# EAGLE board UHS_20 (EAGLE 5.07)
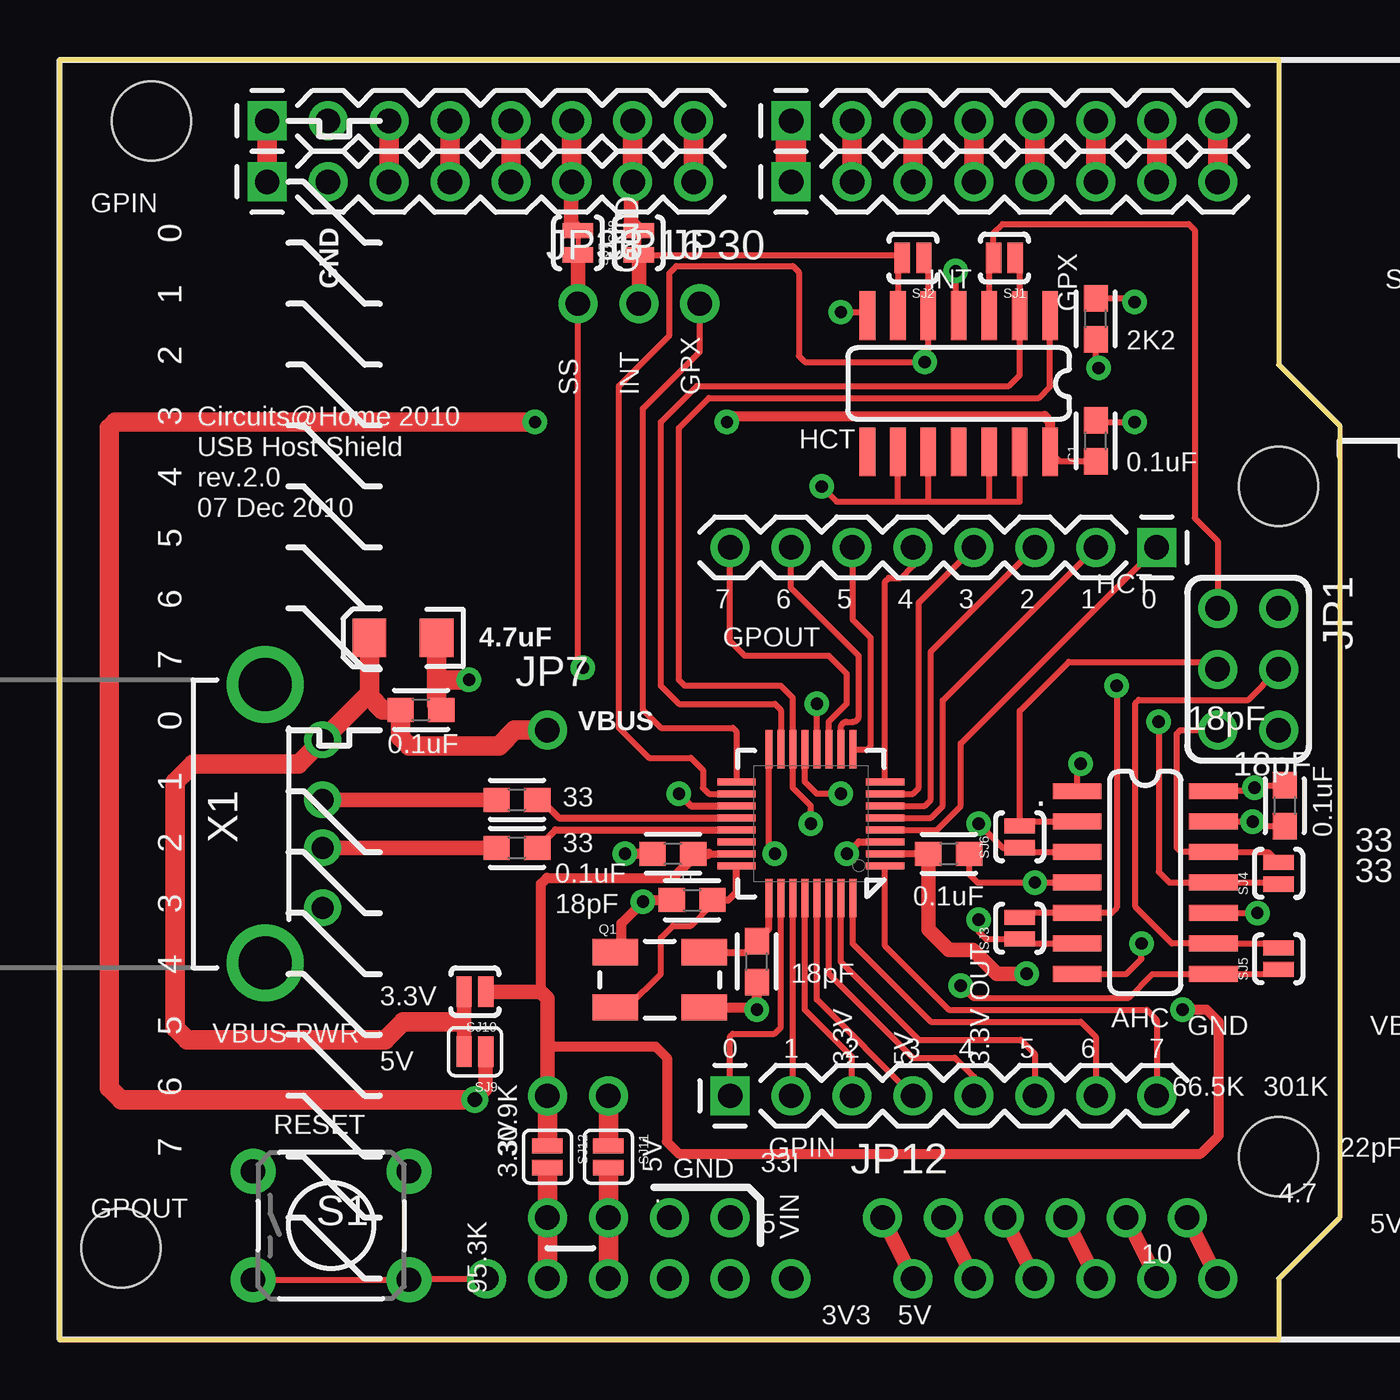
[diagram p0: board, top side]
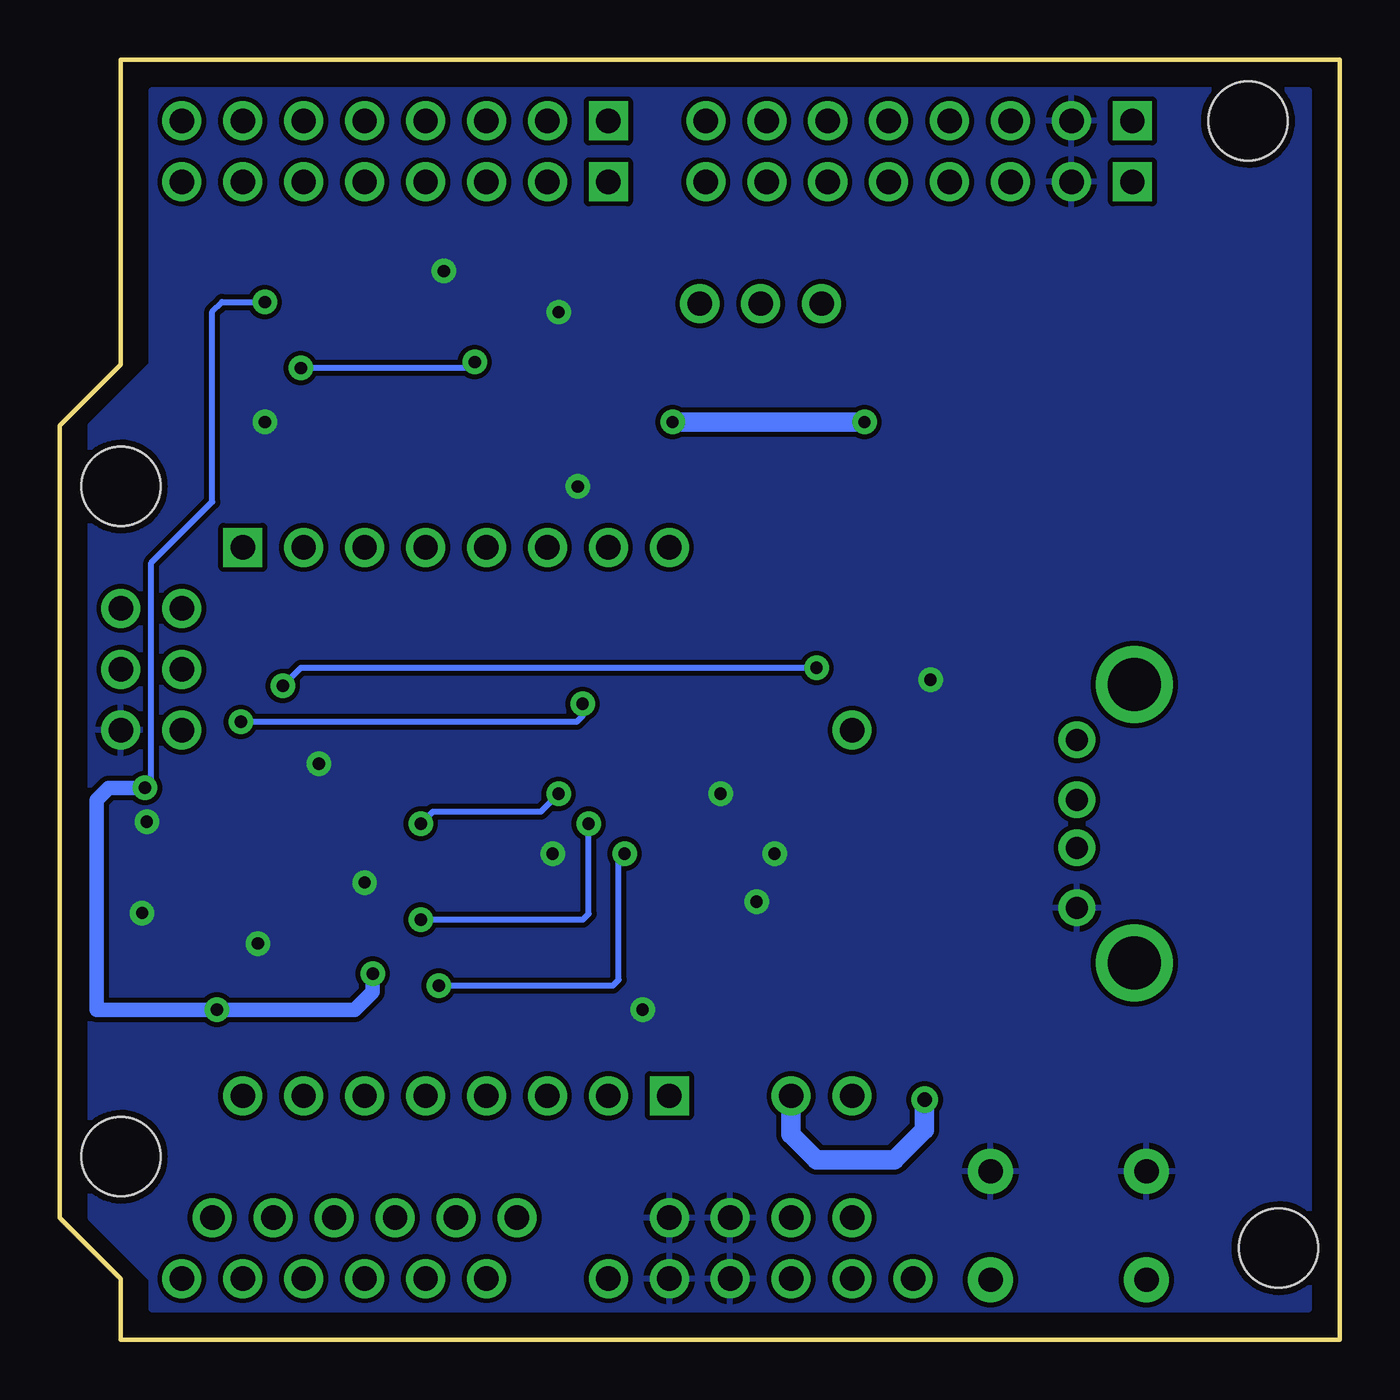
[diagram p1: board, bottom side, seen from below]

Size 53.34 x 53.34 mm. Coordinates in mm from the lower left corner, seen from the top.
Outline: 0,0 0,53.34 50.8,53.34 50.8,40.64 53.34,38.1 53.34,5.08 50.8,2.54 50.8,0 0,0
Copper layers (1*16): Top 0.035mm / dielectric 1.5mm / Bottom 0.035mm
Design rules "CHome": minimum track width 8mil, minimum drill 20mil, track to track 8mil, track to pad 8mil, pad to pad 8mil, via to via 8mil, smd to smd 8mil, copper to edge 10mil, drill to drill 8mil, minimum pad ring 12mil, minimum via ring 10mil, stop-mask expansion 4mil, vias tented up to drill 25mil, thermal gap 10mil
Milling: 8 lines

## Footprints (pad centres in the part's own frame; a part is rotated, then mirrored left to right if it is on the bottom)
0603 = smd 1.1 x 1: 1 -0.85,0; 2 0.85,0
EIA3216 = smd 1.4 x 1.6: A 1.4,0; C -1.4,0
2X03 = drill 1.016 round: 1 -2.54,-1.27; 2 -2.54,1.27; 3 0,-1.27; 4 0,1.27; 5 2.54,-1.27; 6 2.54,1.27
1X08 = drill 1.016 square: 1 0,0 | drill 1.016 round: 2 2.54,0; 3 5.08,0; 4 7.62,0; 5 10.16,0; 6 12.7,0; 7 15.24,0; 8 17.78,0
1X06 = drill 1.016 round: 1 0,0; 2 2.54,0; 3 5.08,0; 4 7.62,0; 5 10.16,0; 6 12.7,0
1X01 = drill 1.016 round: 1 0,0
CRYSTAL-SMD-5X3 = smd 1.9 x 1.1: 1 -1.85,-1.15; 2 1.85,-1.15; 3 1.85,1.15; 4 -1.85,1.15
TACTILE-PTH = drill 1.016 pad 1.88 round: 1 -3.251,2.261; 2 3.251,2.261; 3 -3.251,-2.261; 4 3.251,-2.261
SJ_2S-NO = smd 0.635 x 1.27: 1 -0.45,0; 2 0.45,0
SJ_2S-TRACE = smd 0.635 x 1.27: 1 -0.508,0; 2 0.508,0
SJ_2S = smd 0.635 x 1.27: 1 -0.45,0; 2 0.45,0
TQFP32_8MIL = smd 0.294 x 1.6: 1 -1.75,-3.1; 2 -1.25,-3.1; 3 -0.75,-3.1; 4 -0.25,-3.1; 5 0.25,-3.1; 6 0.75,-3.1; 7 1.25,-3.1; 8 1.75,-3.1; 17 1.75,3.1; 18 1.25,3.1; 19 0.75,3.1; 20 0.25,3.1; 21 -0.25,3.1; 22 -0.75,3.1; 23 -1.25,3.1; 24 -1.75,3.1 | smd 1.6 x 0.294: 9 3.1,-1.75; 10 3.1,-1.25; 11 3.1,-0.75; 12 3.1,-0.25; 13 3.1,0.25; 14 3.1,0.75; 15 3.1,1.25; 16 3.1,1.75; 25 -3.1,1.75; 26 -3.1,1.25; 27 -3.1,0.75; 28 -3.1,0.25; 29 -3.1,-0.25; 30 -3.1,-0.75; 31 -3.1,-1.25; 32 -3.1,-1.75
SO014 = smd 0.66 x 2.032: 1 -3.175,-2.68; 2 -1.905,-2.68; 3 -0.635,-2.68; 4 0.635,-2.68; 5 1.905,-2.68; 6 3.175,-2.68; 7 4.445,-2.68; 8 4.445,2.997; 9 3.175,2.997; 10 1.905,2.997; 11 0.635,2.997; 12 -0.635,2.997; 13 -1.905,2.997; 14 -3.175,2.997
STAND-OFF = hole 3.302: 0,0
USB-A-H = drill 0.914 round: D+ 2.4,-1; D- 2.4,1; GND 2.4,-3.5; VBUS 2.4,3.5 | drill 2.2 round: GND@1 0,5.8; GND@2 0,-5.8

## Placement (x,y rotation side)
C1  0.1uF  [0603]  43.18,37.47 90 top
C3  0.1uF  [0603]  15.05,26.25 0 top
C4  4.7uF  [EIA3216]  14.3,29.25 180 top
C6  0.1uF  [0603]  51.05,22.25 270 top
C7  0.1uF  [0603]  37.05,20.25 0 top
C8  18pF  [0603]  29.05,15.76 90 top
C9  18pF  [0603]  26.35,18.32 0 top
C11  0.1uF  [0603]  25.55,20.25 180 top
JP1  [2X03]  49.53,27.94 270 top
JP2  [1X08]  8.64,50.8 0 top
JP3  [1X08]  8.64,48.26 0 top
JP4  [1X08]  30.48,50.8 0 top
JP5  [1X08]  30.48,48.26 0 top
JP6  [1X06]  17.78,2.54 0 top
JP7  VBUS  [1X01]  20.32,25.4 0 top
JP8  [1X06]  35.56,2.54 0 top
JP9  ARD_5V  [1X01]  22.86,5.08 0 top
JP10  GPIN  [1X08]  27.94,10.16 0 top
JP11  GPOUT  [1X08]  45.72,33.02 180 top
JP12  [1X06]  34.29,5.08 0 top
JP15  ARD_3V3  [1X01]  20.32,5.08 0 top
JP16  INT  [1X01]  24.13,43.18 0 top
JP23  3V3  [1X01]  20.32,10.16 0 top
JP24  5V  [1X01]  22.86,10.16 0 top
JP27  GND  [1X01]  25.4,5.08 0 top
JP28  GND  [1X01]  27.94,5.08 0 top
JP30  GPX  [1X01]  26.67,43.18 0 top
JP38  SS  [1X01]  21.59,43.18 0 top
Q1  12MHz  [CRYSTAL-SMD-5X3]  25,15 0 top
R1  33 1%  [0603]  19.05,20.5 0 top
R2  33 1%  [0603]  19.05,22.5 0 top
R4  2.2K  [0603]  43.18,42.55 90 top
S1  [TACTILE-PTH]  11.3,4.75 0 top
SJ1  SOLDERJUMPERNO  [SJ_2S-NO]  39.37,45.09 180 top
SJ2  SOLDERJUMPERNO  [SJ_2S-NO]  35.56,45.09 180 top
SJ3  SOLDERJUMPERNO  [SJ_2S-NO]  40.01,17.14 90 top
SJ4  SOLDERJUMPERNO  [SJ_2S-NO]  50.8,19.43 90 top
SJ5  SOLDERJUMPERNO  [SJ_2S-NO]  50.8,15.88 90 top
SJ6  SOLDERJUMPERNO  [SJ_2S-NO]  40.01,20.95 90 top
SJ7  SOLDERJUMPERTRACE  [SJ_2S-TRACE]  24.13,45.72 90 top
SJ8  SOLDERJUMPERTRACE  [SJ_2S-TRACE]  21.59,45.72 270 top
SJ9  SOLDERJUMPERNC  [SJ_2S]  17.3,12 180 top
SJ10  SOLDERJUMPERNO  [SJ_2S-NO]  17.3,14.5 180 top
SJ11  SOLDERJUMPERNC  [SJ_2S]  22.86,7.62 270 top
SJ12  SOLDERJUMPERNC  [SJ_2S]  20.32,7.62 270 top
U1  MAX3421E  [TQFP32_8MIL]  31.3,21.5 90 top
U6  74HCT125  [SO014]  38.1,40.01 180 top
U7  74AHC125  [SO014]  45.09,19.68 270 top
U$1  STAND-OFF  [STAND-OFF]  2.54,3.81 0 top
U$3  STAND-OFF  [STAND-OFF]  3.81,50.8 0 top
U$4  STAND-OFF  [STAND-OFF]  50.8,35.56 0 top
U$5  STAND-OFF  [STAND-OFF]  50.8,7.62 0 top
X1  USB-A-H  [USB-A-H]  8.55,21.5 0 top

## Library data of the parts
C1 C3 C4 C6-C9 C11 Q1 R1 R2 R4 = CH_passive
JP1-JP12 JP15 JP16 JP23 JP24 JP27 JP28 JP30 JP38 SJ1-SJ12 X1 = CH_connectors
S1 U$1 U$3-U$5 = SparkFun
U1 = CH_Maxim
U6 U7 = CH_logic

## Nets
3.3V: C6.1 C7.1 C11.1 JP23.1 R4.2 SJ10.1 SJ12.1 U1.2 U1.23 U7.14
5V: C1.1 JP24.1 SJ9.1 SJ11.1 U6.14
ARD_3V3: JP6.2 JP15.1 SJ12.2
ARD_5V: JP6.3 JP9.1 SJ11.2
ARD_MISO: JP1.1 SJ1.2 U6.3
ARD_MOSI: JP1.4 SJ5.2 U7.9
ARD_RST: JP1.5 SJ4.2 U7.12
ARD_SCK: JP1.3 SJ6.2 U7.2
AREF: JP2.1 JP3.1
D0: JP4.8 JP5.8
D1: JP4.7 JP5.7
D2: JP4.6 JP5.6
D3: JP4.5 JP5.5
D4: JP4.4 JP5.4
D5: JP4.3 JP5.3
D6: JP4.2 JP5.2
D7: JP4.1 JP5.1
D8: JP2.8 JP3.8
D9: JP2.7 JP3.7 SJ7.2
D10: JP2.6 JP3.6 SJ8.1
D11: JP2.5 JP3.5
D12: JP2.4 JP3.4
D13: JP2.3 JP3.3
GI0: JP10.1 U1.26
GI1: JP10.2 U1.27
GI2: JP10.3 U1.28
GI3: JP10.4 U1.29
GI4: JP10.5 U1.30
GI5: JP10.6 U1.31
GI6: JP10.7 U1.32
GI7: JP10.8 U1.1
GND: C1.2 C3.2 C4.C C6.2 C7.2 C8.1 C9.1 C11.2 JP1.6 JP2.2 JP3.2 JP6.4 JP6.5 JP27.1 JP28.1 Q1.2 Q1.4 S1.1 S1.2 U1.3 U1.19 U6.4 U6.7 U6.9 U6.10 U6.12 U6.13 U7.1 U7.4 U7.7 U7.10 U7.13 X1.GND
GO0: JP11.1 U1.4
GO1: JP11.2 U1.5
GO2: JP11.3 U1.6
GO3: JP11.4 U1.7
GO4: JP11.5 U1.8
GO5: JP11.6 U1.9
GO6: JP11.7 U1.10
GO7: JP11.8 U1.11
GPX: JP30.1 U1.17
INT: R4.1 SJ2.1 U1.18 U6.5
MISO: SJ1.1 U1.15 U6.2
MOSI: SJ5.1 U1.16 U7.8
MRST: SJ4.1 U1.12 U7.11
N$1: JP8.1 JP12.1
N$2: JP8.2 JP12.2
N$3: JP8.3 JP12.3
N$4: JP8.4 JP12.4
N$5: JP8.5 JP12.5
N$6: JP8.6 JP12.6
N$8: R1.2 U1.21
N$16: R2.2 U1.20
N$40: C8.2 Q1.3 U1.25
N$41: C9.2 Q1.1 U1.24
N$45: R1.1 X1.D+
N$54: R2.1 X1.D-
RESET: JP6.1 S1.3 S1.4
SCLK: SJ6.1 U1.13 U7.3
SS: SJ3.1 U1.14 U6.1 U7.6
U66: JP16.1 SJ2.2 SJ7.1 U6.6
U79: JP38.1 SJ3.2 SJ8.2 U7.5
VBUS: C3.1 C4.A JP7.1 SJ9.2 SJ10.2 X1.VBUS
VIN: JP6.6

## Tracks (layer width: path | path; a pad name or v marks a point on that pad's centre or on a via)
3.3V  (via drill 0.51)
  Top 0.254: U7.14 49.66,22.86 v49.8,23 49.9,23.1 C6.1 | R4.2 44.8,43.4 v44.8,43.25
  Top 0.294: C7.1 U1.2 | 27.05,20.25 U1.23
  Top 0.406: 26.55,20.25 27.05,20.25 | 26.55,20.25 C11.1 | 26.55,20.25 25.55,19.25 20.3,19.25 20.05,19 20.05,14.5 | 20.32,12.22 24.83,12.22 25.3,11.75 25.3,8.25 25.8,7.75 47.55,7.75 48.3,8.5 48.3,13.25 47.8,13.75 v46.8,13.75
  Top 0.61: C7.1 36.2,17.1 37.05,16.25 38.05,16.25 39.05,15.25 v40.3,15.25 | SJ12.1 20.32,8.39 | JP23.1 20.32,12.22 20.32,14.23 20.05,14.5 SJ10.1
  Top 0.813: 20.32,8.39 JP23.1
  Bottom 0.254: v49.8,23 49.53,23 49.53,32.38 46.99,34.92 46.99,42.85 46.59,43.26 v44.8,43.26 v44.8,43.25
  Bottom 0.61: v49.8,23 51.3,23 51.8,22.5 51.8,13.75 v46.8,13.75 41.05,13.75 40.3,14.5 v40.3,15.25
5V  (via drill 0.51, 0.6)
  Top 0.254: C1.1 41.67,36.62 U6.14
  Top 0.406: U6.14 41.27,38.27 41.05,38.5 28.05,38.5 v27.8,38.25
  Top 0.61: 22.86,8.39 SJ11.1 | SJ9.1 17.75,10.45 v17.3,10
  Top 0.813: JP24.1 22.86,8.39 | v17.3,10 2.55,10 2.05,10.5 2.05,38 2.3,38.25 v19.8,38.25
  Bottom 0.813: JP24.1 22.86,8.56 21.8,7.5 18.55,7.5 17.3,8.75 v17.3,10 | v19.8,38.25 v27.8,38.25
ARD_3V3
  Top 0.61: 20.3,7.15 SJ12.2 20.32,6.85
  Top 0.813: JP6.2 JP15.1 20.32,6.85
ARD_5V
  Top 0.61: 22.86,6.85 SJ11.2
  Top 0.813: JP6.3 JP9.1 22.86,6.85
ARD_MISO
  Top 0.254: U6.3 38.73,44.9 SJ1.2 | SJ1.2 38.84,45 | JP1.1 48.26,33.29 47.3,34.25 47.3,46.25 47.05,46.5 39.3,46.5 38.92,46.12 SJ1.2
ARD_MOSI
  Top 0.254: SJ5.2 50.62,16.51 U7.9 46.35,16.51 44.84,18.03 44.84,26.54 44.97,26.67 49.53,26.67 50.74,27.88 50.74,27.94 JP1.4
ARD_RST
  Top 0.254: JP1.5 46.7,25.4 46.55,25.25 46.55,20.5 46.73,20.32 U7.12 50.37,20.32 SJ4.2
ARD_SCK
  Top 0.254: U7.2 40.19,21.59 SJ6.2 40.01,26.2 42.05,28.25 47.95,28.25 JP1.3
AREF
  Top 0.254: 8.55,48.25 8.56,48.26 | 8.56,48.26 JP3.1 | 8.56,48.26 8.64,48.34
  Top 0.813: 8.64,48.34 JP2.1
D0
  Top 0.254: 48.3,48.25 48.29,48.26 | 48.29,48.26 JP5.8 | 48.29,48.26 48.26,48.29
  Top 0.813: 48.26,48.29 JP4.8
D1
  Top 0.254: 45.8,48.25 45.79,48.26 | 45.79,48.26 JP5.7 | 45.79,48.26 45.72,48.33
  Top 0.813: 45.72,48.33 JP4.7
D2
  Top 0.254: 43.3,48.25 43.29,48.26 | 43.29,48.26 JP5.6 | 43.29,48.26 43.18,48.37
  Top 0.813: 43.18,48.37 JP4.6
D3
  Top 0.254: 40.55,48.25 40.56,48.26 | 40.56,48.26 JP5.5 | 40.56,48.26 40.64,48.34
  Top 0.813: 40.64,48.34 JP4.5
D4
  Top 0.254: 38.05,48.25 38.06,48.26 | 38.06,48.26 JP5.4 | 38.06,48.26 38.1,48.3
  Top 0.813: 38.1,48.3 JP4.4
D5
  Top 0.254: JP5.3
  Top 0.813: JP5.3 JP4.3
D6
  Top 0.254: 33.05,48.25 33.04,48.26 | 33.04,48.26 JP5.2 | 33.04,48.26 33.02,48.28
  Top 0.813: 33.02,48.28 JP4.2
D7
  Top 1.27: JP5.1 JP4.1
D8
  Top 0.254: 26.42,48.38 26.54,48.26 JP3.8
  Top 0.813: 26.42,48.38 JP2.8
D9
  Top 0.254: 23.88,48.33 23.81,48.26 JP3.7
  Top 0.61: 23.81,48.26 23.81,46.55 SJ7.2
  Top 0.813: 23.88,48.33 JP2.7
D10
  Top 0.254: 21.31,48.26 JP3.6 | 21.31,48.26 21.34,48.29 | 21.31,48.01 21.31,48.26
  Top 0.61: 21.31,48.01 21.31,46.51 SJ8.1
  Top 0.813: 21.34,48.29 JP2.6
D11
  Top 0.254: JP3.5 18.8,48.25
  Top 0.813: JP3.5 JP2.5
D12
  Top 0.254: 16.3,48.25 16.29,48.26 | 16.29,48.26 JP3.4 | 16.29,48.26 16.26,48.29
  Top 0.813: 16.26,48.29 JP2.4
D13
  Top 0.254: 13.8,48.25 13.79,48.26 | 13.79,48.26 JP3.3 | 13.79,48.26 13.72,48.33
  Top 0.813: 13.72,48.33 JP2.3
GI0
  Top 0.254: U1.26 30.05,13.02 29.78,12.75 28.05,12.75 27.94,12.64 JP10.1
GI1
  Top 0.254: U1.27 30.55,10.23 JP10.2
GI2
  Top 0.254: U1.28 31.05,13.75 33.02,11.78 JP10.3
GI3
  Top 0.254: U1.29 31.55,14.17 JP10.4
GI4
  Top 0.254: U1.30 32.05,15.25 35.55,11.75 37.3,11.75 38.1,10.95 JP10.5
GI5
  Top 0.254: JP10.6 40.64,11.91 40.05,12.5 35.8,12.5 32.55,15.75 U1.31
GI6
  Top 0.254: U1.32 33.05,16.5 36.3,13.25 42.55,13.25 43.18,12.62 JP10.7
GI7
  Top 0.254: U1.1 34.4,16.4 37.05,13.75 45.3,13.75 45.72,13.33 JP10.8
GND  (via drill 0.51)
  Top 0.254: U7.4 v40.64,19.05 38.25,19.05 37.9,19.4 C7.2 | U7.13 v49.72,21.59 49.91,21.4 C6.2 | U7.7 44.45,15.24 45.09,15.88 v45.09,16.51 | U7.10 v49.91,17.78 | U7.1 42.41,23.86 v42.55,24 | U6.13 40.01,34.92 38.73,34.92 | 38.73,34.92 U6.12 | 34.92,34.92 U6.9 | 34.92,34.92 36.2,34.92 | 36.2,34.92 U6.10 | 36.2,34.92 38.73,34.92 | v31.75,35.56 32.38,34.92 34.92,34.92 | v32.55,42.83 33.51,42.83 U6.7 | v37.34,44.54 37.34,42.81 U6.4 | v44.8,38.25 43.24,38.25 C1.2
  Top 0.294: U1.3 33.3,20.75 v32.8,20.25 | U1.19 26.3,22.25 v25.8,22.75
  Top 0.406: C11.2 v23.55,20.25 | C9.1 24.36,18.32 v24.3,18.25 23.4,17.35 23.4,16.4 Q1.4 | C8.1 v29.05,13.75 28.95,13.85 Q1.2
  Top 0.813: 15.7,27.5 15.7,26.45 C3.2 | 15.7,27.5 C4.C | 15.7,27.5 v17.05,27.5
  pour Bottom: 1.27,52.07 49.53,52.07 49.53,40.64 52.07,38.1 52.07,5.08 49.53,2.54 49.53,1.27 1.27,1.27
GO0
  Top 0.254: U1.4 36.55,21.25 37.55,22.25 37.55,24.85 JP11.1
GO1
  Top 0.254: U1.5 36.3,21.75 36.8,22.25 36.8,26.64 JP11.2
GO2
  Top 0.254: U1.6 36.05,22.25 36.3,22.5 36.3,28.68 JP11.3
GO3
  Top 0.254: U1.7 35.55,22.75 35.8,23 35.8,30.72 JP11.4
GO4
  Top 0.254: JP11.5 35.56,32.26 35.05,31.75 34.55,31.75 34.4,31.6 U1.8
GO5
  Top 0.254: JP11.6 33.05,32.99 33.05,30 33.8,29.25 33.8,24.75 33.65,24.6 U1.9
GO6
  Top 0.254: U1.10 32.55,25.5 arc-90 32.8,25.75 33.05,25.75 arc90 33.3,26 33.3,28.5 30.48,31.32 JP11.7
GO7
  Top 0.254: U1.11 32.05,25.75 32.8,26.5 32.8,27.75 32.05,28.5 28.55,28.5 27.94,29.11 JP11.8
GPX
  Top 0.254: U1.17 28.2,25.35 28.05,25.5 25.05,25.5 24.3,26.25 24.3,38.81 26.67,41.18 JP30.1
INT  (via drill 0.51)
  Top 0.254: U1.18 27.05,22.75 26.8,23 26.8,23.75 26.3,24.25 24.55,24.25 23.3,25.5 23.3,39.75 25.4,41.85 25.4,44.45 25.7,44.75 30.55,44.75 30.8,44.5 30.8,41 31.05,40.75 v36.05,40.75 36.2,40.9 U6.5 36.2,44.9 SJ2.1 | v43.3,40.5 43.18,40.5 R4.1
  Bottom 0.254: v43.3,40.5 36.3,40.5 v36.05,40.75
MISO
  Top 0.254: U1.15 30.05,26.25 29.8,26.5 25.8,26.5 25.05,27.25 25.05,38.25 26.55,39.75 39.55,39.75 40.01,40.2 U6.2 40.01,44.9 SJ1.1
MOSI  (via drill 0.51)
  Top 0.254: v37.55,14.75 38.05,14.25 44.55,14.25 45.54,15.24 U7.8 50.62,15.24 SJ5.1 | U1.16 29.55,20.5 v29.8,20.25
  Bottom 0.254: v37.55,14.75 30.3,14.75 30.05,15 30.05,20 v29.8,20.25
MRST  (via drill 0.51)
  Top 0.254: SJ4.1 50.73,19.05 U7.11 46.25,19.05 45.8,19.5 v45.8,25.75 | U1.12 v31.55,26.5
  Bottom 0.254: v45.8,25.75 31.8,25.75 31.55,26 v31.55,26.5
N$1
  Top 0.61: JP12.1 JP8.1
N$2
  Top 0.61: JP12.2 JP8.2
N$3
  Top 0.61: JP12.3 JP8.3
N$4
  Top 0.61: JP12.4 JP8.4
N$5
  Top 0.61: JP12.5 JP8.5
N$6
  Top 0.61: JP12.6 JP8.6
N$8
  Top 0.294: U1.21 20.65,21.25 R1.2
N$16
  Top 0.254: R2.2 20.05,22.5
  Top 0.294: U1.20 20.8,21.75 20.05,22.5
N$40
  Top 0.294: U1.25 29.55,17.11 C8.2 28.59,16.15 Q1.3
N$41
  Top 0.254: 27.11,18.32 27.11,18.07 26.3,17.25 25.55,17.25 25.05,16.75 25.05,15.25 23.65,13.85 Q1.1
  Top 0.294: U1.24 28.2,18.65 27.86,18.32 C9.2 27.11,18.32 | Q1.1 23.55,14
N$45
  Top 0.61: X1.D+ R1.1
N$54
  Top 0.61: X1.D- R2.1
RESET
  Top 0.254: JP6.1 14.6,2.54 S1.4 S1.3
SCLK  (via drill 0.51)
  Top 0.254: U1.13 31.05,23.25 31.55,22.75 v32.55,22.75 | v38.3,21.5 39.3,20.5 SJ6.1 40.19,20.32 U7.3
  Bottom 0.254: v38.3,21.5 37.8,22 33.3,22 v32.55,22.75
SS  (via drill 0.51)
  Top 0.254: v38.3,17.5 38.3,17 38.6,16.7 SJ3.1 40.19,16.51 U7.6 | v31.3,21.5 31.3,22.25 30.55,23 U1.14 30.55,26.75 30.05,27.25 26.05,27.25 25.8,27.5 25.8,38 27.05,39.25 40.8,39.25 41.27,39.73 U6.1
  Bottom 0.254: v31.3,21.5 31.3,17.75 31.55,17.5 v38.3,17.5
U66
  Top 0.254: U6.6 34.92,44.9 SJ2.2 35.11,45.21 SJ7.1
  Top 0.61: SJ7.1 JP16.1
U79  (via drill 0.51)
  Top 0.254: SJ3.2 40.19,17.78 U7.5 43.83,17.78 44.05,18 v44.05,27.25 | JP38.1 21.59,28.21 v21.8,28
  Top 0.61: JP38.1 SJ8.2
  Bottom 0.254: v44.05,27.25 43.3,28 v21.8,28
VBUS
  Top 0.254: 12.9,26.95 12.9,26.8
  Top 0.61: 16.85,13.24 SJ9.2 | 16.85,13.24 SJ10.2 | 16.56,13.24 16.85,13.24
  Top 0.813: 16.56,13.24 16.55,13.25 14.3,13.25 13.55,12.5 5.3,12.5 4.8,13 4.8,23.25 5.55,24 9.95,24 X1.VBUS 12.9,26.95 C4.A | 12.9,26.8 13.45,26.25 C3.1 14.2,25.1 14.55,24.75 18.3,24.75 18.95,25.4 JP7.1

## Text on the board
tPlace: GND | 2K2 | SS | INT | GPX | Circuits@Home 2010 | USB Host Shield | HCT | rev.2.0 | 0.1uF | 07 Dec 2010 | 7 | 6 | 5 | 4 | 3 | 2 | 1 | 0 | 4.7uF | GPOUT | VBUS | 0.1uF | 33 | 0.1uF | 33 | 0.1uF | 18pF | 0.1uF | 18pF | 3.3V | AHC | VBUS PWR | 0 | 1 | 2 | 3 | 4 | 5 | 6 | 7 | 5V | RESET | GPIN | 3.3V | 5V | GND | VIN | Released under Creative Commons | Attribution-NonCommercial-ShareAlike License | http://creativecommons.org/licenses/by-nc-sa/3.0 | Copyright (c) 2011 Circuits At Home | All Rights Reserved
tNames: GPIN | 0 | GPX | GND | INT | SPARE | 1 | 2 | 3 | 4 | 5 | HCT | 6 | 7 | 0 | 18pF | 1 | 18pF | . | 2 | 33 | 33 | 3 | 4 | 5 | GND | VBUS | 3.3V | 5V | 3.3V OUT | 6 | 66.5K | 301K | 7 | 30.9K | 22pF | 33I | . | 4.7 | GPOUT | 5 | 5V_IN | 10 | 95.3K | 3V3 | 5V
_tsilk: GPIN | AHC | 0 | MAX | RST | GND | 1 | 2 | 3 | 4 | 5 | AHC | HCT | SPARE | 6 | Circuits@Home 2009 | 2K2 | 7 | USB Host Shield | 0 | v1.2rc | 0 | 02 Nov 2009 | 1 | 2 | HCT | 3 | 4 | 3.3V OUT | 5 | S1 | VBUS | 6 | 3.3V | 5V | 66.5K | 301K | 7 | 30.9K | 22pF | 33I | GND | . | 4.7 | GPOUT | 5 | 5V_IN | 10 | 95.3K | 3V3 | 5V